# Altium PCB PCB1.pcbdoc
Units mil, origin at the board's own origin, x right, y up, seen from the top; angles counter-clockwise.
Board outline 1320.66 x 1332.05 mil, 2 copper layers (Top Layer, Bottom Layer); 7 components, 40 nets, 110 pads, 61 vias.
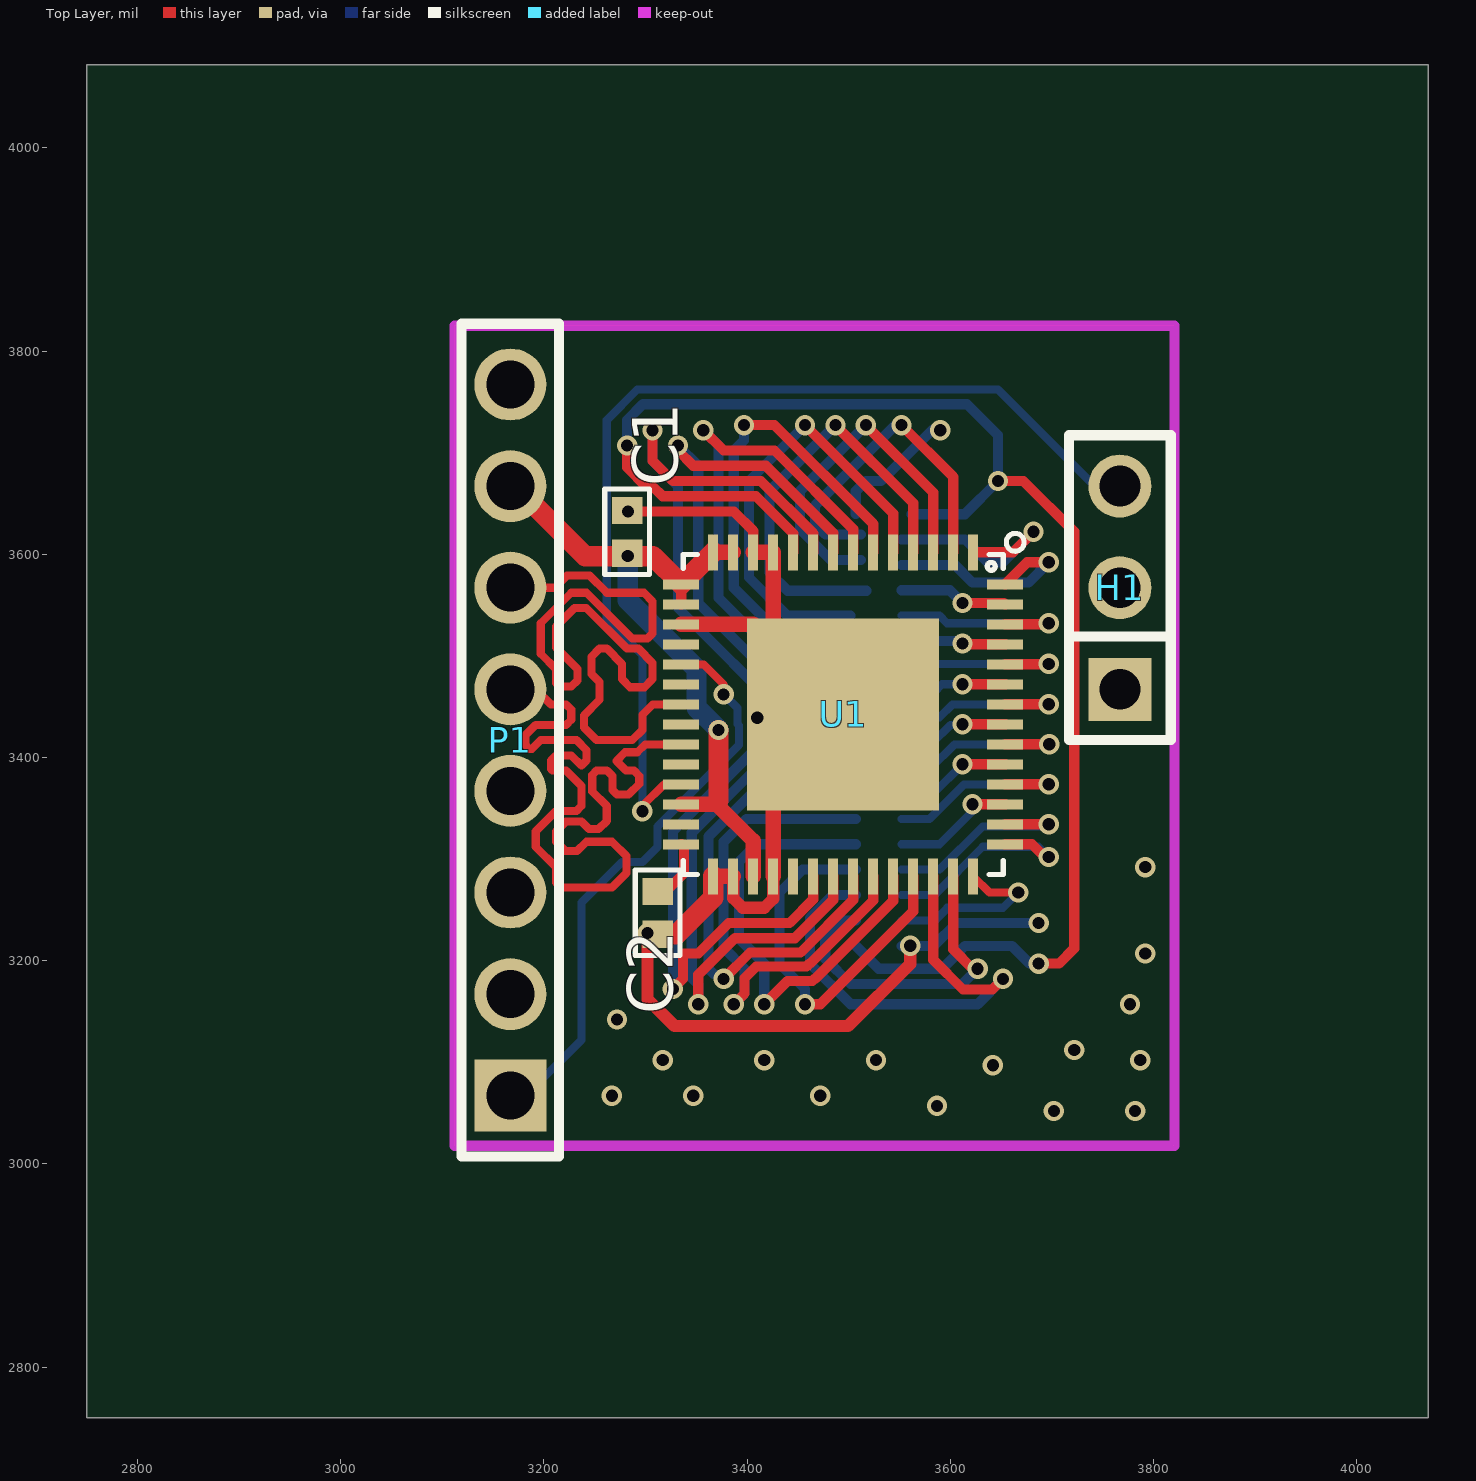
[diagram p0: Top Layer view]
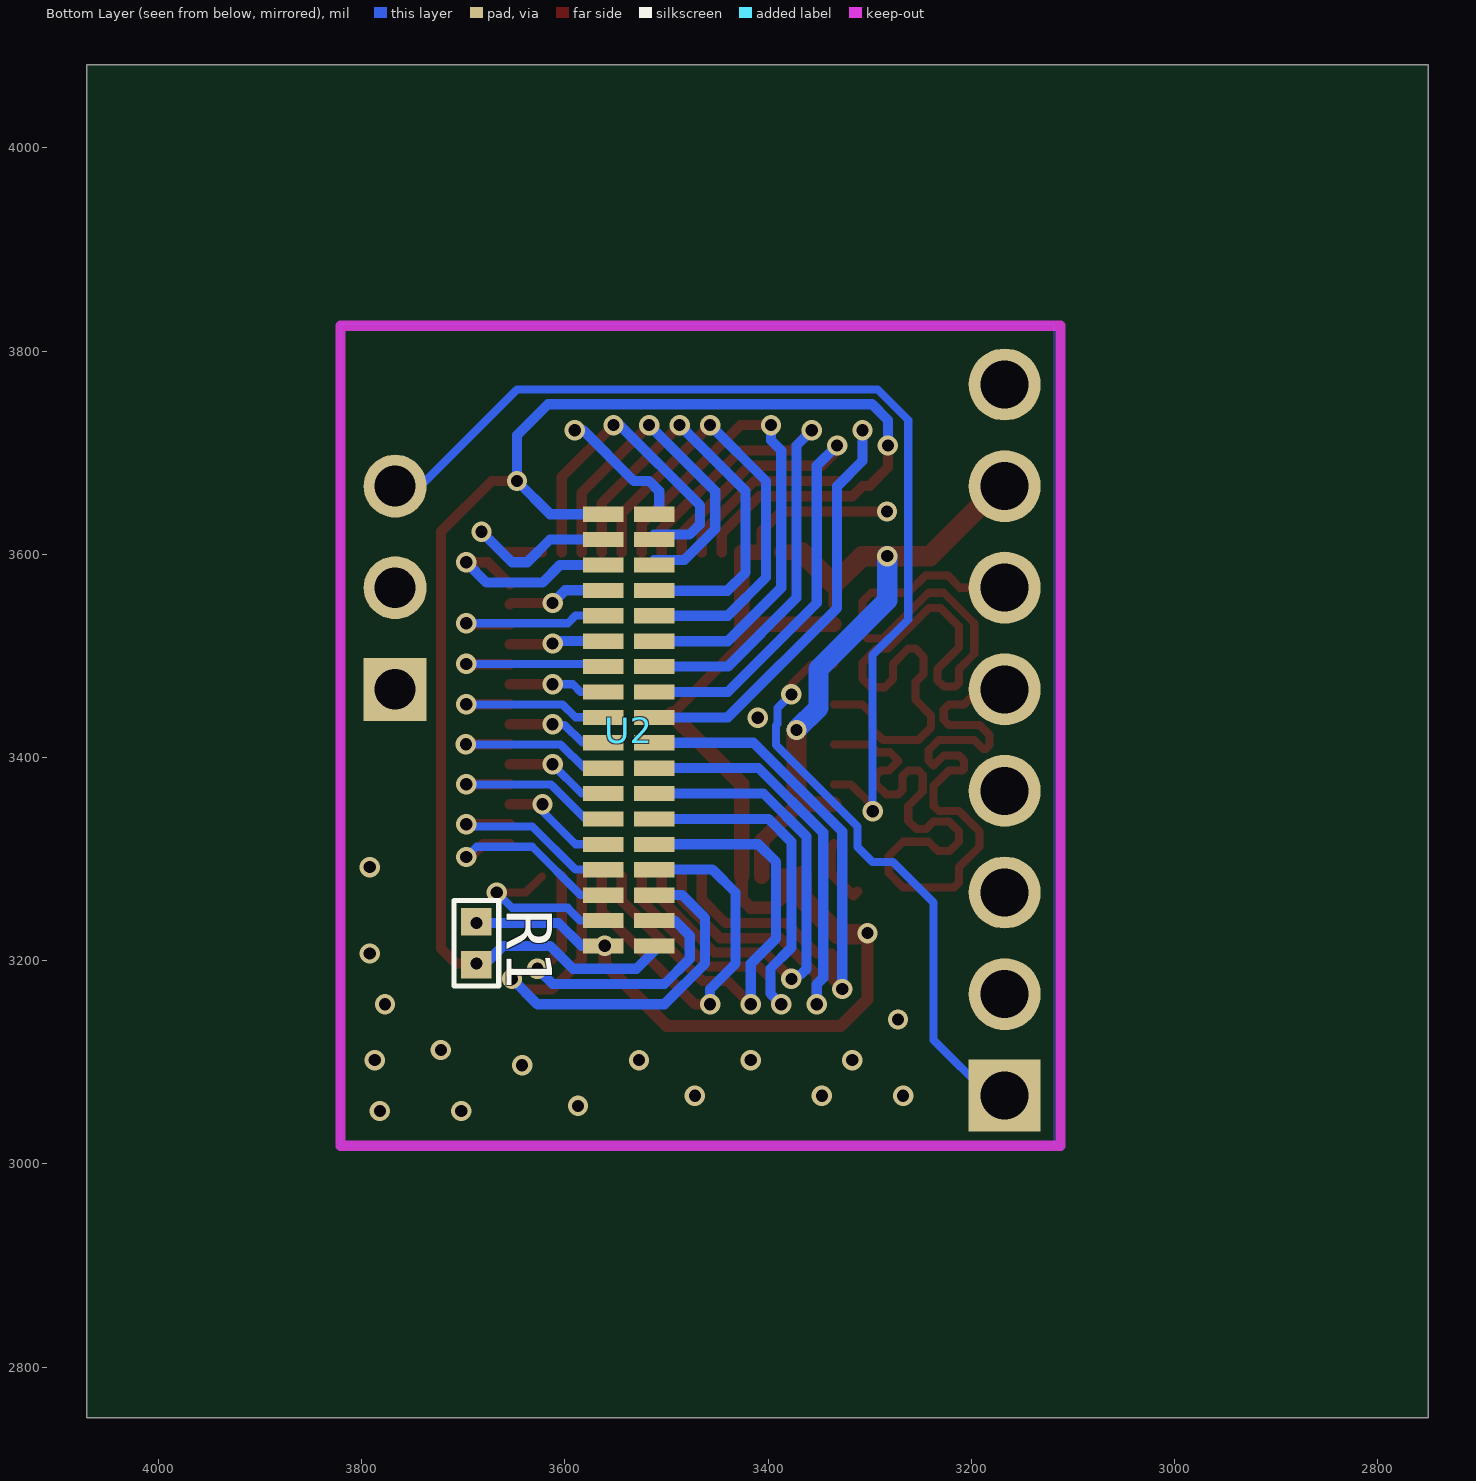
[diagram p1: Bottom Layer view, seen from below]

## Layer stack, top to bottom
Top Layer: signal copper (thickness not stored)
Dielectric: dielectric 12.6, FR-4, Dk 4.8
Bottom Layer: signal copper (thickness not stored)

## Board outline
4070.66,2750 2750,2750 2750,4082.05 4070.66,4082.05

## Design rules (kind name [scope] priority, off if disabled: settings)
Clearance copperThickness1oz [All] p1: gap=7 ignorepadtopadclearanceinfootprint=FALSE except(4: Track-Track; 5.5: Track-Via; 6: Track-SMDPad SMDPad-SMDPad Track-THPad SMDPad-THPad THPad-THPad SMDPad-Via THPad-Via Via-Via Track-Fill SMDPad-Fill THPad-Fill Via-Fill Fill-Fill SMDPad-Region THPad-Region Via-Region Fill-Region Region-Region Track-Poly SMDPad-Poly THPad-Poly Via-Poly Fill-Poly Poly-Poly Track-Text SMDPad-Text THPad-Text Via-Text Fill-Text Region-Text Poly-Text Text-Text Track-Hole SMDPad-Hole THPad-Hole Via-Hole Fill-Hole Region-Hole Poly-Hole Text-Hole; 11.8: Track-Region Region-Poly Track-Sheet SMDPad-Sheet THPad-Sheet Via-Sheet Fill-Sheet Region-Sheet Poly-Sheet Text-Sheet Sheet-Hole)
Clearance copperThickness2oz [All] p1: gap=7 ignorepadtopadclearanceinfootprint=FALSE except(6: Track-SMDPad SMDPad-SMDPad Track-THPad SMDPad-THPad THPad-THPad Track-Via SMDPad-Via THPad-Via Via-Via Track-Fill SMDPad-Fill THPad-Fill Via-Fill Fill-Fill SMDPad-Region THPad-Region Via-Region Fill-Region Region-Region Track-Poly SMDPad-Poly THPad-Poly Via-Poly Fill-Poly Poly-Poly Track-Text SMDPad-Text THPad-Text Via-Text Fill-Text Region-Text Poly-Text Text-Text Track-Hole SMDPad-Hole THPad-Hole Via-Hole Fill-Hole Region-Hole Poly-Hole Text-Hole; 8: Track-Track; 11.8: Track-Region Region-Poly Track-Sheet SMDPad-Sheet THPad-Sheet Via-Sheet Fill-Sheet Region-Sheet Poly-Sheet Text-Sheet Sheet-Hole)
DiffPairsRouting differentialPair [All] p1: maxuncoupledlength=10 maxlimit=6 mostfreqgap=6 toplayer_minwidth=5 toplayer_prefwidth=10 toplayer_maxwidth=100 bottomlayer_minwidth=5 bottomlayer_prefwidth=10 bottomlayer_maxwidth=100
PasteMaskExpansion pasteMaskExpansion [All] p1:
PlaneConnect innerPlane [All] p1: planeconnectstyle=Relief reliefexpansion=20 reliefentries=4 reliefconductorwidth=10 reliefairgap=10
PolygonConnect copperRegion [All] p1: connectstyle=Relief reliefentries=4 reliefconductorwidth=10 polygonreliefangle="90 Angle" airgapwidth=10
RoutingVias viaSize [All] p1: viastyle="Through Hole" holewidth=12 minholewidth=11.8 maxholewidth=248 width=24 minwidth=19.7 maxwidth=393.7
SolderMaskExpansion solderMaskExpansion [All] p1: useseparateexpansions=TRUE expansion=2 expansionbottom=2
Width copperThickness1oz [All] p1: maxlimit=100 minlimit=5 preferedwidth=10
Width copperThickness2oz [All] p1: maxlimit=100 minlimit=8 preferedwidth=10

## Components (designator, comment, footprint, x,y, rotation, side; value= is the part's Value field where it differs from the comment)
C1 "100n" 0402 3282,3622.2 r90 top
C2 "10n" 0402 3312,3247.2 r270 top
H1 "PM254V-11-03-H85" HDR-TH_3P-P2.54-V-F 3767,3567.2 r90 top
P1 "2.54-1*8P母环保" HDR-TH_8P-P2.54-V-F-1 3167,3417.2 r90 top
R1 "0" 0402 3687,3217.2 r270 bottom
U1 "RHD2132_QFN" QFN56_8_X_8_LARGE 3494.68,3442.58 r270 top
U2 "OMNETICS_A79027" OMNETICS_A79027 3542,3417.2 r180 bottom

## Footprints (in the part's own frame and the unit in brackets; to place one, negate y for a bottom-side part, rotate by r counter-clockwise, add the part's x,y. Pads: shape width x height; smd on the part's side, far side on the other; paste and mask are expansions set on the pad)
0402 [mil]
  rect 27x30 smd: 1(-21,0) 2(21,0)
  silkscreen extent -42,-22 42,22
HDR-TH_3P-P2.54-V-F [mil]
  rect 62x62 hole 40.16: 1(-100,0)
  round 62 hole 40.16: 2(0,0) 3(100,0)
  silkscreen extent -150,-50 150,50
HDR-TH_8P-P2.54-V-F-1 [mm]
  rect 1.8x1.8 hole 1.2: 1(-8.89,0)
  round 1.8 hole 1.2: 2(-6.35,0) 3(-3.81,0) 4(-1.27,0) 5(1.27,0) 6(3.81,0) 7(6.35,0) 8(8.89,0)
  silkscreen extent -10.41,-1.22 10.41,1.22
OMNETICS_A79027 [mil]
  rect 40x15 smd: B1(30,222.34) B2(30,197.34) B3(30,172.34) B4(30,147.34) B5(30,122.34) B6(30,97.34) B7(30,72.34) B8(30,47.34) B9(30,22.34) B10(30,-2.66) B11(30,-27.66) B12(30,-52.66) B13(30,-77.66) B14(30,-102.66) B15(30,-127.66) B16(30,-152.66) B17(30,-177.66) B18(30,-202.66) T1(-20,222.34) T2(-20,197.34) T3(-20,172.34) T4(-20,147.34) T5(-20,122.34) T6(-20,97.34) T7(-20,72.34) T8(-20,47.34) T9(-20,22.34) T10(-20,-2.66) T11(-20,-27.66) T12(-20,-52.66) T13(-20,-77.66) T14(-20,-102.66) T15(-20,-127.66) T16(-20,-152.66) T17(-20,-177.66) T18(-20,-202.66)
QFN56_8_X_8_LARGE [mm]
  rect 0.9x0.25 smd: 1(-4.05,3.25) 2(-4.05,2.75) 3(-4.05,2.25) 4(-4.05,1.75) 5(-4.05,1.25) 6(-4.05,0.75) 7(-4.05,0.25) 8(-4.05,-0.25) 9(-4.05,-0.75) 10(-4.05,-1.25) 11(-4.05,-1.75) 12(-4.05,-2.25) 13(-4.05,-2.75) 14(-4.05,-3.25) 29(4.05,-3.25) 30(4.05,-2.75) 31(4.05,-2.25) 32(4.05,-1.75) 33(4.05,-1.25) 34(4.05,-0.75) 35(4.05,-0.25) 36(4.05,0.25) 37(4.05,0.75) 38(4.05,1.25) 39(4.05,1.75) 40(4.05,2.25) 41(4.05,2.75) 42(4.05,3.25)
  rect 0.25x0.9 smd: 15(-3.25,-4.05) 16(-2.75,-4.05) 17(-2.25,-4.05) 18(-1.75,-4.05) 19(-1.25,-4.05) 20(-0.75,-4.05) 21(-0.25,-4.05) 22(0.25,-4.05) 23(0.75,-4.05) 24(1.25,-4.05) 25(1.75,-4.05) 26(2.25,-4.05) 27(2.75,-4.05) 28(3.25,-4.05) 43(3.25,4.05) 44(2.75,4.05) 45(2.25,4.05) 46(1.75,4.05) 47(1.25,4.05) 48(0.75,4.05) 49(0.25,4.05) 50(-0.25,4.05) 51(-0.75,4.05) 52(-1.25,4.05) 53(-1.75,4.05) 54(-2.25,4.05) 55(-2.75,4.05) 56(-3.25,4.05)
  rect 4.8x4.8 smd: CENTER(0,0)
  silkscreen extent -4.52,-4 4,4.52

## Via types
v1: diameter 20, hole 12, Top Layer to Bottom Layer, 61 vias

## Nets (pads, with @x,y where several pads share a name; then routed paths per layer and width w, separated by ;. In a path a pad name is that pad's centre, name@x,y a point inside that pad or via, vN(x,y) a via of type N, cw(c..) or ccw(c..) an arc to the next point about the centre after c; other vN are vias at no path point)
$1N1124: U1.3 U2.B3 | length 354.4
  Top Layer w10: v1(3517,3727.2) 3583.26,3660.94 U1.3
  Bottom Layer w10: U2.B3@3512,3594.55 3482.36,3594.55 3452,3624.9 3452,3662.2 v1(3517,3727.2)
$1N1129: U1.4 U2.B4 | length 431.7
  Top Layer w10: v1(3487,3727.2) 3563.58,3650.63 U1.4
  Bottom Layer w10: v1(3487,3727.2) 3422,3662.2 3422,3582.2 3440.07,3564.13 U2.B4@3517.42,3564.13
$1N1134: U1.5 U2.B5 | length 449.4
  Top Layer w10: v1(3457,3727.2) 3543.89,3640.31 U1.5
  Bottom Layer w10: v1(3457,3727.2) 3402,3672.2 3402,3577.2 3439.66,3539.55 U2.B5@3501.84,3539.55
$1N1139: U1.41 U2.B17 | length 329.2
  Top Layer w10: U1.41 3602.95,3211.26 3622,3192.2 v1(3627,3192.2)
  Bottom Layer w10: U2.B17@3507,3239.7 3491.94,3239.7 3477,3224.76 3477,3202 3501.8,3177.2 3612,3177.2 v1(3627,3192.2)
$1N1144: U1.40 U2.B16 | length 483.6
  Top Layer w10: U1.40 3583.26,3200.94 3612.5,3171.7 3641.5,3171.7 v1(3652,3182.2)
  Bottom Layer w10: U2.B16@3507,3264.7 3484.5,3264.7 3462,3242.2 3462,3197.2 3502,3157.2 3627,3157.2 v1(3652,3182.2)
$1N1149: U1.39 U2.B15 | length 383.5
  Top Layer w10: v1(3457,3157.2) 3472,3157.2 3563.58,3248.78 U1.39
  Bottom Layer w10: v1(3457,3157.2) 3457,3172.2 3432,3197.2 3432,3267.2 3454.5,3289.7 U2.B15@3507,3289.7
$1N1154: U1.38 U2.B14 | length 466
  Top Layer w10: v1(3417,3157.2) 3440,3180.2 3464.59,3180.2 3465.81,3182.2 3467,3182.2 3543.89,3259.1 U1.38
  Bottom Layer w10: v1(3417,3157.2) 3417,3197.2 3392,3222.2 3392,3297.2 3409.5,3314.7 U2.B14@3507,3314.7
$1N1159: U1.37 U2.B13 | length 524.4
  Top Layer w10: v1(3387,3157.2) 3397.49,3167.69 3397.49,3182.89 3408.8,3194.2 3458.6,3194.2 3461.46,3197.2 3462,3197.2 3524.21,3259.41 U1.37
  Bottom Layer w10: v1(3387,3157.2) 3397.5,3167.7 3397.5,3192.45 3377,3212.95 3377,3317.2 3399.5,3339.7 U2.B13@3507,3339.7
$1N1164: U1.35 U2.B11 | length 574.7
  Top Layer w10: v1(3352,3157.2) 3352,3186.2 3388.01,3222.2 3447,3222.2 3484.84,3260.04 U1.35
  Bottom Layer w10: v1(3352,3157.2) 3352,3176.81 3345.61,3183.2 3345.61,3326.01 3409.3,3389.7 U2.B11@3507,3389.7
$1N1169: U1.50 U2.T9 | length 193.1
  Top Layer w10: U1.50 v1(3697,3452.42)
  Bottom Layer w8: U2.T9@3552,3439.7 3589.5,3439.7 3602.21,3452.42 v1(3697,3452.42)
$1N1171: U1.51 U2.T8 | length 105.3
  Top Layer w10: v1(3612,3472.2) 3626.9,3472.2 3627,3472.1 U1.51
  Bottom Layer w8: U2.T8@3552,3464.7 3584.5,3464.7 3592,3472.2 v1(3612,3472.2)
$1N1173: U1.52 U2.T7 | length 189.1
  Top Layer w10: U1.52 3696.58,3491.79 v1(3697,3492.2)
  Bottom Layer w8: U2.T7@3552,3489.7 3554.5,3492.2 v1(3697,3492.2)
$1N1175: 
$1N1177: U1.55 U2.T4 | length 107.9
  Top Layer w10: v1(3612,3552.2) 3652.77,3552.2 U1.55
  Bottom Layer w10: U2.T4@3552,3564.7 3599.5,3564.7 v1(3612,3552.2)
$1N1179: U1.54 U2.T5 | length 191.4
  Top Layer w10: U1.54 3695.95,3531.16 v1(3697,3532.2)
  Bottom Layer w8: U2.T5@3552,3539.7 3589.5,3539.7 3597,3532.2 v1(3697,3532.2)
$1N1181: U1.53 U2.T6 | length 103.5
  Top Layer w10: v1(3612,3512.2) 3612.73,3511.47 U1.53
  Bottom Layer w10: U2.T6@3552,3514.7 3609.5,3514.7 v1(3612,3512.2)
$1N1183: U1.49 U2.T10 | length 109.6
  Top Layer w10: v1(3612,3432.73) U1.49
  Bottom Layer w8: U2.T10@3552,3414.7 3582.66,3414.7 3600.16,3432.2 3611.47,3432.2 v1(3612,3432.73)
$1N1185: U1.48 U2.T11 | length 187.9
  Top Layer w10: U1.48 3687,3413.05
  Bottom Layer w8: U2.T11@3552,3389.7 3580.76,3389.7 3604.11,3413.05 v1(3697.38,3413.05)
$1N1187: U1.47 U2.T12 | length 114
  Top Layer w10: v1(3612,3393.36) U1.47
  Bottom Layer w8: U2.T12@3552,3364.7 3583.34,3364.7 v1(3612,3393.36)
$1N1189: U1.46 U2.T13 | length 201.9
  Top Layer w10: U1.46 v1(3697,3373.68)
  Bottom Layer w8: U2.T13@3552,3339.7 3579.5,3339.7 3613.47,3373.68 v1(3697,3373.68)
$1N1191: U1.45 U2.T14 | length 122.4
  Top Layer w10: v1(3622,3353.99) U1.45
  Bottom Layer w8: U2.T14@3552,3314.7 3589.5,3314.7 3622,3347.2 v1(3622,3353.99)
$1N1193: U1.44 U2.T15 | length 206.3
  Top Layer w10: U1.44 v1(3697,3334.31)
  Bottom Layer w8: U2.T15@3552,3289.7 3589.5,3289.7 3632,3332.2 3694.9,3332.2 v1(3697,3334.31)
$1N1195: U1.43 U2.T16 | length 216.8
  Top Layer w10: U1.43 3680.44,3314.62 3690.44,3304.62 3694.58,3304.62 v1(3697,3302.2)
  Bottom Layer w8: U2.T16@3552,3264.7 3584.5,3264.7 3632,3312.2 3687,3312.2 v1(3697,3302.2)
$1N1197: U1.1 U2.T2 | length 219.5
  Top Layer w10: U1.1 3661.82,3602.02 v1(3682,3622.2)
  Bottom Layer w10: U2.T2@3552,3614.7 3614.5,3614.7 3637,3592.2 3652,3592.2 v1(3682,3622.2)
$1N1201: U1.42 U2.T17 | length 177.7
  Top Layer w8: U1.42 3638.55,3267.2 v1(3667,3267.2)
  Bottom Layer w8: U2.T17@3552,3239.7 3585.17,3239.7 3597,3251.53 3597,3252.2 3652,3252.2 v1(3667,3267.2)
$1N1205: R1.2 U1.10 U2.B18 U2.T1 | length 1536
  Top Layer w10: v1(3282,3707.2) 3282,3685.48 3300.28,3667.2 3307,3667.2 3317,3657.2 3408.79,3657.2 3445.47,3620.53 U1.10 ; v1(3647,3672.2) 3672,3672.2 3722,3622.2 3722,3212.2 3707,3197.2 v1(3687,3197.2)
  Bottom Layer w10: v1(3282,3707.2) 3282,3732.2 3297.5,3747.7 3616.5,3747.7 3647,3717.2 v1(3647,3672.2) 3614.34,3639.55 U2.T1 ; U2.B18@3507,3214.7 3529.5,3192.2 3592,3192.2 3614.5,3214.7 3660.68,3214.7 3678.18,3197.2 v1(3687,3197.2)
$1N1319: C2.1 U1.28 | length 66.3
  Top Layer w10: C2.1 3316,3264.2 3338,3286.2 3338,3311.85 U1.28
$1N1328: U1.9 U2.B9 | length 646.4
  Top Layer w10: v1(3307,3722.2) 3307,3692.2 3327,3672.2 3413.59,3672.2 3465.15,3620.65 U1.9
  Bottom Layer w10: v1(3307,3722.2) 3307,3692.2 3332,3667.2 3332,3547.2 3439.66,3439.55 U2.B9
$1N1333: U1.8 U2.B8 | length 569.9
  Top Layer w10: v1(3332,3707.2) 3332,3702.2 3347,3687.2 3418.39,3687.2 3484.84,3620.76 U1.8
  Bottom Layer w10: v1(3332,3707.2) 3352,3687.2 3352,3552.2 3439.66,3464.55 U2.B8
$1N1338: U1.7 U2.B7 | length 549.8
  Top Layer w10: v1(3357,3722.2) 3377,3702.2 3427,3702.2 3504.52,3624.68 U1.7
  Bottom Layer w10: v1(3357,3722.2) 3372,3707.2 3372,3557.2 3439.66,3489.55 U2.B7
$1N1343: U1.6 U2.B6 | length 506.4
  Top Layer w10: v1(3397,3727.2) 3427,3727.2 3524.21,3630 U1.6
  Bottom Layer w10: v1(3397,3727.2) 3397,3712.2 3387,3702.2 3387,3567.2 3439.66,3514.55 U2.B6
$1N1348: U1.2 U2.B2 | length 331.7
  Top Layer w10: v1(3552,3727.2) 3602.95,3676.26 U1.2
  Bottom Layer w10: U2.B2@3512,3619.55 3477.16,3619.55 3467,3629.7 3467,3648.21 3545.99,3727.2 v1(3552,3727.2)
$1N1353: U1.34 U2.B10 | length 588.2
  Top Layer w10: v1(3327,3172.2) 3337,3182.2 3337,3207.2 3352,3207.2 3382,3237.2 3441.94,3237.2 3465.15,3260.41 U1.34
  Bottom Layer w10: v1(3327,3172.2) 3327,3327.2 3414.34,3414.55 U2.B10
$1N1358: U1.36 U2.B12 | length 482.6
  Top Layer w10: v1(3377,3182.2) 3403,3208.2 3452.8,3208.2 3504.52,3259.93 U1.36
  Bottom Layer w10: 3367,3187.2 3362,3192.2 3362,3322.2 3404.5,3364.7 U2.B12@3507,3364.7
CS: P1.1 U1.19 | length 559.8
  Top Layer w8: U1.19 3357.42,3491.79 3377,3472.2 v1(3377,3462.2)
  Bottom Layer w8: P1.1@3182,3067.2 3237,3122.2 3237,3257.2 3277,3297.2 3297,3297.2 3311.96,3312.16 3311.96,3332.16 3392,3412.2 3392,3431.71 3390.56,3433.15 3390.56,3448.64 v1(3377,3462.2)
GND: C1.2 C2.2 P1.8 R1.1 U1.11 U1.12 U1.17 U1.29 U1.30 U1.32 U1.CENTER U2.B1 U2.T18 | length 1502.4
  Top Layer w10: v1(3282.93,3642.2) 3387,3642.2 3406.1,3623.11 U1.12 ; U1.CENTER@3425.78,3511.47 U1.CENTER
  Top Layer w12: C2.2 3311,3227.2 v1(3302,3227.2) 3302,3162.2 3328.5,3135.7 3499.51,3135.7 3560.67,3196.87 v1(3560.67,3214.7) ; U1.30 3386.41,3261.62 3395.82,3252.2 3417,3252.2 3425.78,3260.99 U1.32
  Top Layer w15: U1.17 3406.1,3531.16 3425.78,3511.47 U1.11 U1.12 ; U1.29 U1.30 ; U1.32 3425.78,3373.68 U1.CENTER
  Top Layer w20: C2.2 3331,3226.2 3366.73,3261.93 U1.29
  Bottom Layer w10: U2.B1@3507,3639.7 3507,3662.2 3517,3672.2 3532,3672.2 v1@3582,3722.2 ; U2.T18@3552,3214.7 3583.66,3214.7 3606.16,3237.2 v1(3687,3237.2)
  other v1: 3702,3052.2 3782,3052.2 3587,3057.2 3267,3067.2 3347,3067.2 3472,3067.2 3642,3097.2 3317,3102.2 3417,3102.2 3527,3102.2 3787,3102.2 3722,3112.2 3272,3142.2 3777,3157.2 3792,3207.2 3792,3292.2 3410.06,3439.29 3590.2,3722.2
MISO: H1.3 U1.25 | length 1008.6
  Top Layer w8: v1(3297,3347.2) 3297,3352.54 3318.14,3373.68 U1.25
  Bottom Layer w8: v1(3297,3347.2) 3297,3500.93 3262,3535.93 3262,3732.2 3292,3762.2 3647,3762.2 3742,3667.2 H1.3
MOSI: P1.5 U1.23 | length 915.9
  Top Layer w8: P1.5 3192,3467.2 3207,3452.2 3222,3452.2 3227,3447.2 3227,3437.2 3222,3432.2 3192,3432.2 3182,3422.2 3182,3412.2 3185.51,3408.7 3188.49,3408.7 3197,3417.2 3232,3417.2 3242,3407.2 3242,3397.2 3237,3392.2 3227,3402.2 3212,3402.2 3207,3397.2 3207,3388.75 3208.54,3387.2 3222,3387.2 3237,3372.2 3237,3352.2 3236.82,3352.2 3232,3347.38 3212.18,3347.38 3192,3327.2 3192,3312.2 3212,3292.2 3212,3277.2 3217,3272.2 3267,3272.2 3281.2,3286.4 3281.2,3303 3267,3317.2 3242,3317.2 3232.74,3307.95 3221.26,3307.95 3212,3317.2 3212,3327.2 3222,3337.2 3237.13,3337.2 3244.57,3329.77 3254,3329.77 3262,3337.77 3262,3352.2 3247.66,3366.55 3247.66,3382.86 3252,3387.2 3262,3387.2 3267.5,3381.7 3267.5,3368.27 3272.13,3363.65 3283.44,3363.65 3293.97,3374.17 3293.97,3381.91 3288.68,3387.2 3280.96,3387.2 3271.48,3396.68 3280,3405.2 3291.97,3405.2 3299.81,3413.05 U1.23
SCLK: P1.6 U1.21 | length 917.6
  Top Layer w8: P1.6 3211.05,3567.2 3222.9,3579.05 3245.15,3579.05 3262,3562.2 3298.43,3562.2 3307,3553.63 3307,3522.2 3302,3517.2 3287,3517.2 3242,3562.2 3227,3562.2 3197,3532.2 3197,3502.2 3212,3487.2 3212,3473.46 3215.64,3469.82 3226.95,3469.82 3233.04,3475.9 3233.04,3487.22 3212,3508.26 3212,3529.16 3230.05,3547.2 3241.74,3547.2 3281.74,3507.2 3293.05,3507.2 3307,3493.26 3307,3477.2 3299,3469.2 3285,3469.2 3277,3477.2 3277,3492.2 3262,3507.2 3254.92,3507.2 3246.92,3499.2 3246.92,3482.28 3254.92,3474.28 3254.92,3456.92 3239.47,3441.47 3239.47,3429.73 3252,3417.2 3287,3417.2 3297,3427.2 3297,3442.2 3307.21,3452.42 U1.21
VCC: C1.1 P1.7 U1.13 U1.14 U1.15 U1.16 U1.26 U1.31 | length 693.1
  Top Layer w10: U1.16 U1.15
  Top Layer w15: U1.26 3370.21,3353.99 3406.1,3318.11 U1.31 ; U1.14 U1.13
  Top Layer w20: P1.7@3167,3672.2 3240.9,3598.3 v1(3282.6,3598.3) 3307.46,3598.3 U1.15 U1.14 ; 3372,3357.2 v1(3372,3427.2)
  Bottom Layer w20: v1(3282.6,3598.3) 3282.6,3554.95 3350.27,3487.27 3350.27,3448.93 v1(3372,3427.2)
pads on no net: H1.1 H1.2 P1.2 P1.3 P1.4 U1.18 U1.20 U1.22 U1.24 U1.27 U1.33 U1.56 U2.T3
copper on no net: | length 212.4
  Top Layer w10: 3654.13,3570.53 3675.8,3592.2 v1(3697,3592.2)
  Bottom Layer w10: 3552,3589.7 3604.5,3589.7 3622,3572.2 3677,3572.2 v1(3697,3592.2)

## Polygon pours and split planes (outlines as drawn)
GND on Top Layer (solid, remove dead copper): 3112,3017.91 3820.66,3017.91 3820.66,3825 3112,3825
GND on Bottom Layer (solid, remove dead copper, pour order 4): 3118.97,3017.91 3820.66,3017.91 3820.66,3827.05 3118.97,3827.05

## Keep-outs
Board Outline Layer:
  lines w10: 3112,3017.91 3820.66,3017.91 3820.66,3825 3112,3825 3112,3017.91